# EAGLE board Board (EAGLE 8.0.2)
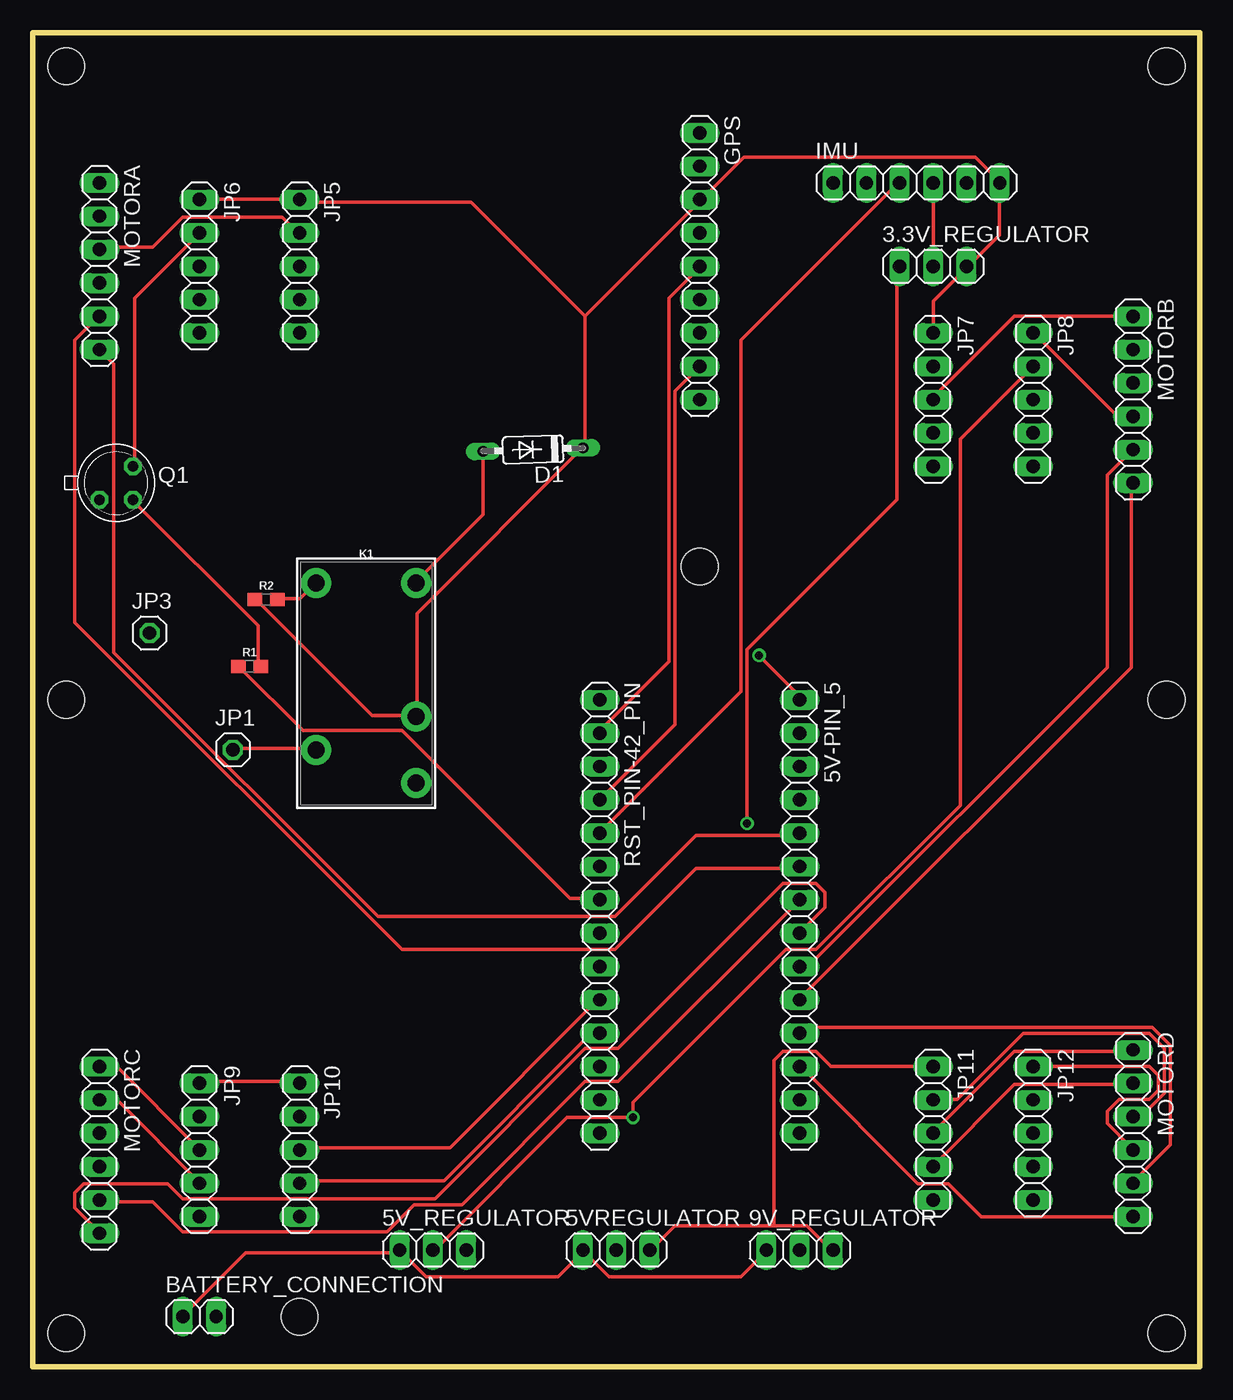
[diagram p0: board, top side]
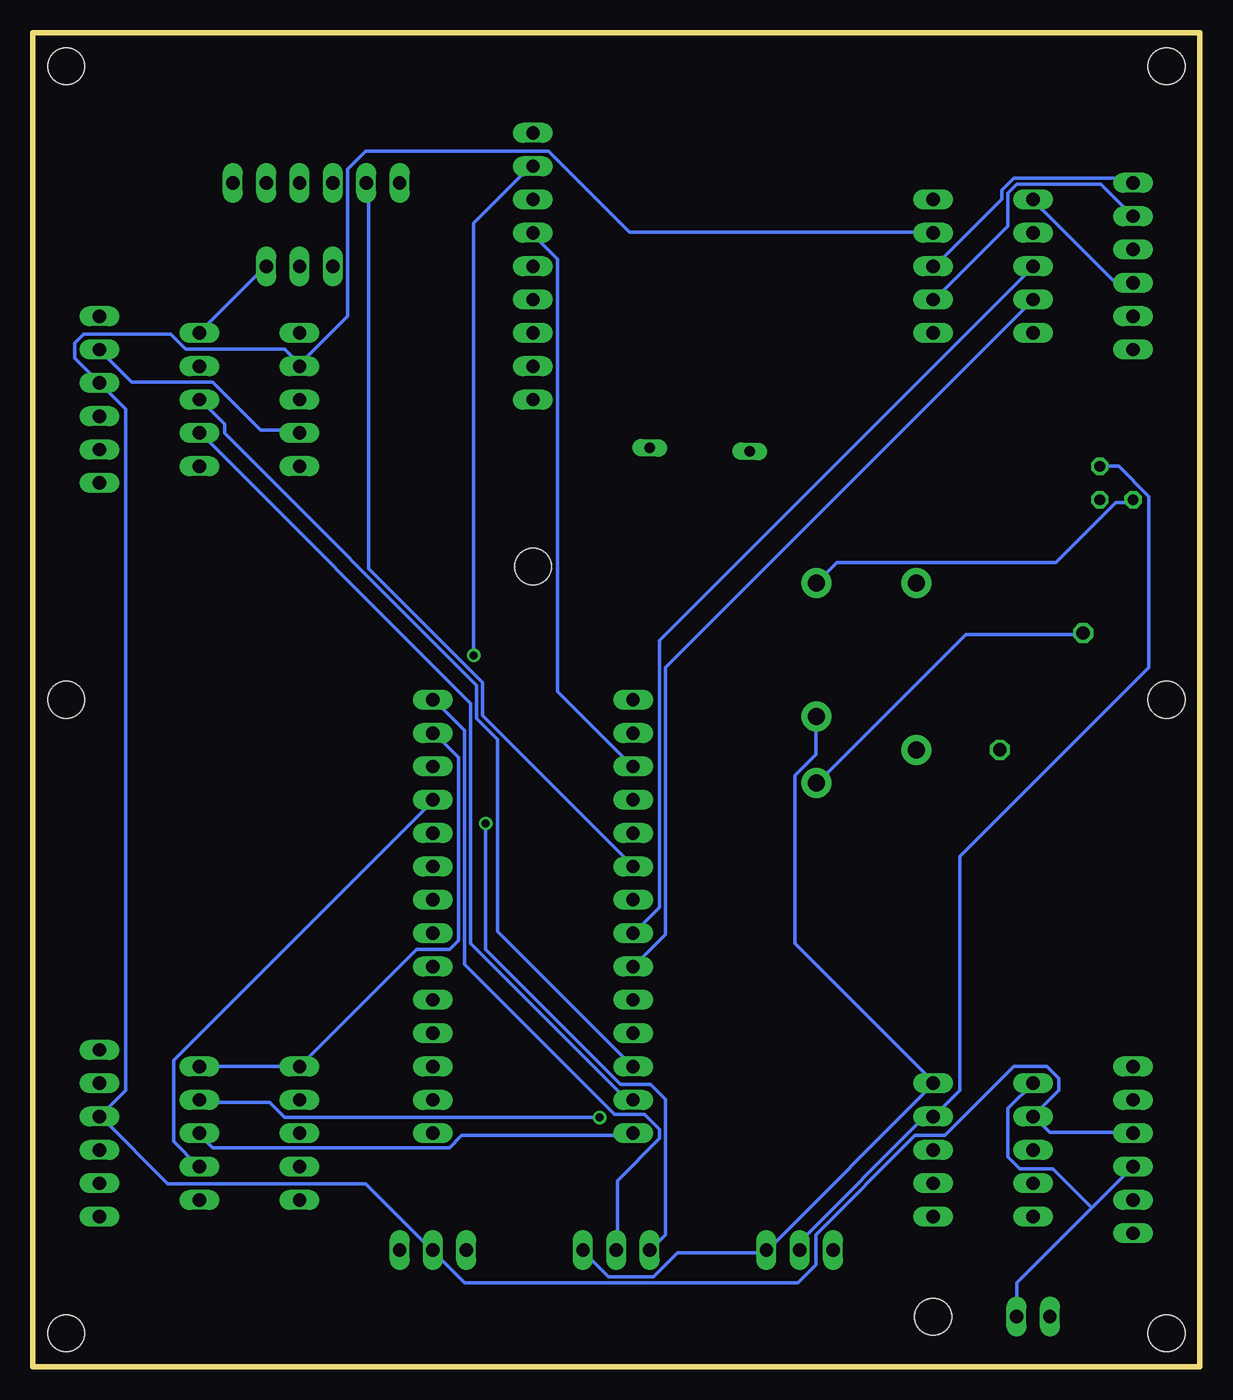
[diagram p1: board, bottom side, seen from below]

Size 88.9 x 101.6 mm. Coordinates in mm from the lower left corner, seen from the top.
Outline: 0,0 88.9,0 88.9,101.6 0,101.6 0,0
Copper layers (1*16): Top 0.035mm / dielectric 1.5mm / Bottom 0.035mm
Design rules "default": minimum track width 10mil, minimum drill 24mil, track to track 8mil, track to pad 8mil, pad to pad 8mil, via to via 8mil, smd to smd 8mil, copper to edge 40mil, drill to drill 8mil, minimum pad ring 10mil, minimum via ring 8mil, stop-mask expansion 4mil, vias tented up to drill 0mil, thermal gap 10mil
Holes 2.8 mm at 2.54,99.06 2.54,2.54 86.36,2.54 86.36,99.06 86.36,50.8 2.54,50.8 50.8,60.96 20.32,3.81

## Footprints (pad centres in the part's own frame; a part is rotated, then mirrored left to right if it is on the bottom)
1X03 = drill 1.016 long: 1 -2.54,0; 2 0,0; 3 2.54,0
1X14 = drill 1.016 long: 1 -16.51,0; 2 -13.97,0; 3 -11.43,0; 4 -8.89,0; 5 -6.35,0; 6 -3.81,0; 7 -1.27,0; 8 1.27,0; 9 3.81,0; 10 6.35,0; 11 8.89,0; 12 11.43,0; 13 13.97,0; 14 16.51,0
1X02 = drill 1.016 long: 1 -1.27,0; 2 1.27,0
DO35-7 = drill 0.813 long: A 3.81,0; C -3.81,0
1X09 = drill 1.016 long: 1 -10.16,0; 2 -7.62,0; 3 -5.08,0; 4 -2.54,0; 5 0,0; 6 2.54,0; 7 5.08,0; 8 7.62,0; 9 10.16,0
1X06 = drill 1.016 long: 1 -6.35,0; 2 -3.81,0; 3 -1.27,0; 4 1.27,0; 5 3.81,0; 6 6.35,0
1X01 = drill 1.016 octagon: 1 0,0
1X05 = drill 1.016 long: 1 -5.08,0; 2 -2.54,0; 3 0,0; 4 2.54,0; 5 5.08,0
RELAY-JZC = drill 1.3 pad 2.286: 1 3.81,-8.89; 2 -3.81,1.27; 3 -3.81,6.35; 4 3.81,3.81; 5 -3.81,-8.89
TO18 = drill 0.813 octagon: 1 -1.27,-1.27; 2 1.27,-1.27; 3 1.27,1.27
0603 = smd 1.1 x 1: 1 -0.85,0; 2 0.85,0

## Placement (x,y rotation side)
3.3V_REGULATOR  [1X03]  68.58,83.82 0 top
5V-PIN_5  [1X14]  58.42,34.29 270 top
5V_REGULATOR  [1X03]  30.48,8.89 0 top
5VREGULATOR  [1X03]  44.45,8.89 0 top
9V_REGULATOR  [1X03]  58.42,8.89 0 top
BATTERY_CONNECTION  [1X02]  12.7,3.81 0 top
D1  1N4148DO35-7  [DO35-7]  38.1,69.85 181.9 top
GPS  [1X09]  50.8,83.82 270 top
IMU  [1X06]  67.31,90.17 0 top
JP1  [1X01]  15.24,46.99 0 top
JP3  [1X01]  8.89,55.88 0 top
JP5  [1X05]  20.32,83.82 270 top
JP6  [1X05]  12.7,83.82 270 top
JP7  [1X05]  68.58,73.66 270 top
JP8  [1X05]  76.2,73.66 270 top
JP9  [1X05]  12.7,16.51 270 top
JP10  [1X05]  20.32,16.51 270 top
JP11  [1X05]  68.58,17.78 270 top
JP12  [1X05]  76.2,17.78 270 top
K1  RELAY-SPDT-JZC-11F  [RELAY-JZC]  25.4,50.8 180 top
MOTORA  [1X06]  5.08,83.82 270 top
MOTORB  [1X06]  83.82,73.66 270 top
MOTORC  [1X06]  5.08,16.51 270 top
MOTORD  [1X06]  83.82,17.78 270 top
Q1  2N2222A  [TO18]  6.35,67.31 0 top
R1  330  [0603]  16.51,53.34 0 top
R2  330  [0603]  17.78,58.42 0 top
RST_PIN-42_PIN  [1X14]  43.18,34.29 270 top

## Library data of the parts
3.3V_REGULATOR 5V-PIN_5 5V_REGULATOR 5VREGULATOR 9V_REGULATOR BATTERY_CONNECTION GPS IMU JP1 JP3 JP5-JP12 MOTORA MOTORB MOTORC MOTORD RST_PIN-42_PIN = pinhead
D1 = diode
K1 = SparkFun-Electromechanical; PROD_ID: COMP-09533; SF_SKU: COM-00100
Q1 = transistor-npn
R1 R2 = SparkFun-Resistors; PROD_ID: RES-00818

## Nets
N$1: GPS.5 RST_PIN-42_PIN.2
N$2: GPS.4 RST_PIN-42_PIN.3
N$3: Q1.2 R1.2
N$4: R1.1 RST_PIN-42_PIN.7
N$5: GPS.8 RST_PIN-42_PIN.4
N$6: IMU.3 RST_PIN-42_PIN.5
N$7: IMU.2 RST_PIN-42_PIN.6
N$8: JP6.3 RST_PIN-42_PIN.8
N$9: JP6.4 RST_PIN-42_PIN.9
N$11: JP10.3 RST_PIN-42_PIN.10
N$12: JP10.4 RST_PIN-42_PIN.11
N$13: JP8.3 RST_PIN-42_PIN.12
N$14: JP8.4 RST_PIN-42_PIN.13
N$15: JP12.3 RST_PIN-42_PIN.14
N$16: 5V-PIN_5.4 JP12.4
N$17: JP5.3 MOTORA.1
N$18: 9V_REGULATOR.2 JP5.2 JP7.2 JP9.2 JP11.2 MOTORA.3 MOTORB.3 MOTORC.3 MOTORD.3
N$19: 5V-PIN_5.7 MOTORC.5
N$20: JP9.4 MOTORC.2
N$21: 5V-PIN_5.8 MOTORC.6
N$22: 5V-PIN_5.9 MOTORB.5
N$23: 5V-PIN_5.5 MOTORA.6
N$24: 5V-PIN_5.6 MOTORA.5
N$25: 5V-PIN_5.10 MOTORB.6
N$26: 5V-PIN_5.11 MOTORD.5
N$27: 5V-PIN_5.12 MOTORD.6
N$28: JP11.3 MOTORD.1
N$29: JP11.4 MOTORD.2
N$30: JP5.4 MOTORA.2
N$31: K1.1 R2.2
N$32: D1.A K1.5 Q1.1
N$33: 3.3V_REGULATOR.1 5V_REGULATOR.1 5VREGULATOR.1 9V_REGULATOR.1 BATTERY_CONNECTION.1
N$34: JP7.3 MOTORB.1
N$35: JP7.4 MOTORB.2
N$36: JP1.1 K1.4
N$37: 5V_REGULATOR.2 JP6.2 JP8.2 JP10.2 JP12.2 Q1.3
N$38: JP3.1 K1.3
N$39: 5V-PIN_5.1 5VREGULATOR.2 GPS.2
N$40: JP9.3 MOTORC.1
N$41: 3.3V_REGULATOR.2 IMU.4
N$46: 3.3V_REGULATOR.3 5V-PIN_5.2 5V_REGULATOR.3 5VREGULATOR.3 9V_REGULATOR.3 BATTERY_CONNECTION.2 D1.C GPS.3 IMU.6 JP5.1 JP6.1 JP7.1 JP8.1 JP9.1 JP10.1 JP11.1 JP12.1 K1.2 MOTORA.4 MOTORB.4 MOTORC.4 MOTORD.4 R2.1

## Tracks (layer width: path | path; a pad name or v marks a point on that pad's centre or on a via)
N$1
  Top 0.254: RST_PIN-42_PIN.2 43.2,48.46 48.46,53.72 48.46,81.38 50.75,83.67 GPS.5
N$2
  Bottom 0.254: RST_PIN-42_PIN.3 43.2,45.72 48.92,51.44 48.92,84.35 50.75,86.18 GPS.4
N$3
  Top 0.254: R1.2 17.14,53.49 17.14,56.46 7.77,65.84 Q1.2
N$4
  Top 0.254: R1.1 15.77,53.26 20.57,48.46 28.12,48.46 40.92,35.66 42.98,35.66 RST_PIN-42_PIN.7
N$5
  Top 0.254: RST_PIN-42_PIN.4 48.92,48.92 48.92,74.3 50.75,76.12 GPS.8
N$6
  Top 0.254: RST_PIN-42_PIN.5 43.2,40.69 53.95,51.44 53.95,78.18 65.84,90.07 IMU.3
N$7
  Bottom 0.254: RST_PIN-42_PIN.6 43.2,38.18 54.63,49.61 54.63,52.12 63.32,60.81 63.32,90.07 IMU.2
N$8
  Bottom 0.254: JP6.3 12.8,83.67 41.15,55.32 41.15,34.98 42.98,33.15 RST_PIN-42_PIN.8
N$9
  Bottom 0.254: JP6.4 12.8,81.15 40.69,53.26 40.69,32.92 42.98,30.63 RST_PIN-42_PIN.9
N$11
  Top 0.254: JP10.3 20.34,16.69 31.77,16.69 42.98,27.89 RST_PIN-42_PIN.10
N$12
  Top 0.254: JP10.4 20.34,14.17 31.32,14.17 42.52,25.38 42.98,25.38 RST_PIN-42_PIN.11
N$13
  Bottom 0.254: RST_PIN-42_PIN.12 43.2,22.86 53.49,33.15 53.49,47.78 55.09,49.38 55.09,51.89 74.3,71.09 74.3,71.78 76.12,73.61 JP8.3
N$14
  Bottom 0.254: RST_PIN-42_PIN.13 43.2,20.34 43.66,20.34 55.55,32.23 55.55,50.52 76.12,71.09 JP8.4
N$15
  Bottom 0.254: RST_PIN-42_PIN.14 43.2,17.6 56.24,17.6 57.15,16.69 75.21,16.69 76.12,17.6 JP12.3
N$16
  Bottom 0.254: 5V-PIN_5.4 58.52,42.98 78.18,23.32 78.18,17.14 76.35,15.32 JP12.4
N$17
  Bottom 0.254: JP5.3 20.12,83.9 15.09,88.92 15.09,89.61 14.17,90.53 5.49,90.53 5.26,90.3 MOTORA.1
N$18
  Top 0.254: JP11.2 68.58,20.34 70.41,20.34 75.44,25.38 85.04,25.38 86.18,24.23 86.18,20.8 84.58,19.2 83.9,19.2 MOTORD.3 | MOTORA.3 5.26,85.27 9.14,85.27 11.43,87.55 18.97,87.55 20.12,86.41 JP5.2
  Bottom 0.254: MOTORC.3 5.26,17.83 11.43,17.83 12.57,18.97 JP9.2 12.57,19.2 10.74,21.03 10.74,21.95 11.66,22.86 14.17,22.86 19.43,17.6 21.72,17.6 29.26,10.06 29.26,7.77 30.63,6.4 56.01,6.4 58.29,8.69 9V_REGULATOR.2 58.52,8.91 63.55,13.95 78.64,13.95 83.67,18.97 MOTORD.3 81.84,21.03 81.84,72.92 83.67,74.75 MOTORB.3 83.9,74.98 85.72,76.81 85.72,77.95 85.04,78.64 78.41,78.64 77.27,77.5 69.72,77.5 68.58,76.35 | 68.58,76.35 64.92,80.01 64.92,91.21 63.55,92.58 49.61,92.58 43.43,86.41 20.34,86.41 JP5.2 | 68.58,76.35 JP7.2
N$19
  Top 0.254: 5V-PIN_5.7 44.58,21.72 42.06,21.72 32.69,12.34 29.03,12.34 26.98,10.29 11.43,10.29 9.14,12.57 5.26,12.57 MOTORC.5
N$20
  Top 0.254: MOTORC.2 5.26,20.12 6.63,20.12 12.57,14.17 JP9.4
N$21
  Top 0.254: MOTORC.6 5.03,10.29 3.2,12.12 3.2,13.26 3.89,13.95 10.29,13.95 11.43,12.8 30.63,12.8 42.06,24.23 44.58,24.23 57.15,36.8 59.66,36.8 60.35,36.12 60.35,34.98 58.52,33.15 5V-PIN_5.8
N$22
  Top 0.254: 5V-PIN_5.9 58.52,30.63 59.21,30.63 81.84,53.26 81.84,67.89 83.67,69.72 MOTORB.5
N$23
  Top 0.254: 5V-PIN_5.5 58.29,40.46 50.52,40.46 44.35,34.29 26.29,34.29 6.17,54.41 6.17,76.35 5.26,77.27 MOTORA.6
N$24
  Top 0.254: 5V-PIN_5.6 58.29,37.95 50.52,37.95 44.35,31.77 28.12,31.77 3.2,56.69 3.2,78.18 5.03,80.01 MOTORA.5
N$25
  Top 0.254: 5V-PIN_5.10 58.52,28.12 83.67,53.26 83.67,67.21 MOTORB.6
N$26
  Top 0.254: MOTORD.5 83.9,14.17 86.64,16.92 86.64,24.46 85.27,25.83 58.75,25.83 58.52,25.6 5V-PIN_5.11
N$27
  Top 0.254: MOTORD.6 72.24,11.43 69.72,13.95 67.44,13.95 58.52,22.86 5V-PIN_5.12
N$28
  Top 0.254: JP11.3 68.58,17.83 74.75,24 83.67,24 MOTORD.1
N$29
  Top 0.254: JP11.4 68.58,15.32 74.75,21.49 83.67,21.49 MOTORD.2
N$30
  Bottom 0.254: JP5.4 20.12,81.38 14.63,86.87 14.63,89.38 13.95,90.07 7.54,90.07 5.26,87.78 MOTORA.2
N$31
  Top 0.254: R2.2 18.75,58.52 20.34,58.52 21.49,59.66 K1.1
N$32
  Top 0.254: D1.A 34.29,64.92 29.26,59.89 K1.5
  Bottom 0.254: Q1.1 5.26,65.84 6.4,65.84 10.97,61.27 27.66,61.27 29.03,59.89 K1.5
N$33  (via drill 0.61)
  Top 0.254: BATTERY_CONNECTION.1 11.43,3.89 16.23,8.69 27.89,8.69 5V_REGULATOR.1 28.12,8.69 29.95,6.86 40.01,6.86 41.83,8.69 5VREGULATOR.1 42.06,8.69 43.89,6.86 53.95,6.86 55.78,8.69 9V_REGULATOR.1 | v54.41,41.38 54.41,54.63 65.84,66.06 65.84,83.67 3.3V_REGULATOR.1
  Bottom 0.254: v54.41,41.38 54.41,31.77 44.12,21.49 41.83,21.49 40.69,20.34 40.69,10.06 41.83,8.91 5VREGULATOR.1
N$34
  Top 0.254: MOTORB.1 74.75,80.01 68.58,73.84 JP7.3
N$35
  Bottom 0.254: JP7.4 68.58,71.32 71.55,71.32 75.21,74.98 81.38,74.98 83.67,77.27 MOTORB.2
N$36
  Top 0.254: JP1.1 15.32,47.09 21.49,47.09 K1.4
N$37  (via drill 0.61)
  Top 0.254: Q1.3 7.77,68.58 7.77,81.38 12.57,86.18 JP6.2 | 5V_REGULATOR.2 30.63,8.91 40.69,18.97 v45.72,18.97 45.72,20.12 57.38,31.77 59.66,31.77 70.64,42.75 70.64,70.64 JP8.2
  Bottom 0.254: 5V_REGULATOR.2 30.4,8.91 30.4,9.6 21.03,18.97 20.34,18.97 JP10.2 20.12,19.2 18.29,21.03 18.29,38.86 3.89,53.26 3.89,66.29 6.17,68.58 Q1.3 | v45.72,18.97 69.72,18.97 70.87,20.12 76.12,20.12 JP12.2
N$38
  Bottom 0.254: JP3.1 8.91,55.78 17.83,55.78 29.03,44.58 K1.3
N$39  (via drill 0.61)
  Top 0.254: v55.32,54.18 58.52,50.98 5V-PIN_5.1
  Bottom 0.254: 5VREGULATOR.2 44.35,8.91 44.35,14.17 41.15,17.37 41.15,18.06 42.29,19.2 44.58,19.2 56.01,30.63 56.01,48.46 58.29,50.75 5V-PIN_5.1 | v55.32,54.18 55.32,87.1 50.98,91.44 GPS.2
N$40
  Top 0.254: MOTORC.1 6.4,22.86 12.57,16.69 JP9.3
N$41
  Top 0.254: IMU.4 3.3V_REGULATOR.2
N$46
  Top 0.254: JP7.1 68.58,81.15 71.09,83.67 3.3V_REGULATOR.3 71.32,83.9 73.61,86.18 73.61,90.07 IMU.6 73.61,90.3 71.78,92.13 54.18,92.13 50.98,88.92 GPS.3 50.75,88.7 42.06,80.01 | MOTORB.4 83.67,72.47 82.53,72.47 76.35,78.64 JP8.1 | JP6.1 12.8,88.92 20.12,88.92 JP5.1 20.34,88.7 33.38,88.7 42.06,80.01 | R2.1 17.14,58.29 25.83,49.61 29.03,49.61 K1.2 29.26,49.61 29.26,57.38 41.83,69.95 D1.C 42.06,70.18 42.06,80.01 | JP12.1 85.04,22.86 85.72,22.17 85.72,21.03 85.04,20.34 82.75,20.34 81.84,19.43 81.84,18.52 83.67,16.69 MOTORD.4 | 56.46,10.74 48.92,10.74 47.09,8.91 5VREGULATOR.3 | 56.46,10.74 58.98,10.74 60.81,8.91 9V_REGULATOR.3 | JP9.1 12.8,21.72 20.12,21.72 JP10.1 | JP11.1 60.81,22.86 59.66,24 57.15,24 56.46,23.32 56.46,10.74
  Bottom 0.254: JP8.1 76.12,78.87 71.32,83.67 3.3V_REGULATOR.3 | MOTORA.4 5.26,82.75 6.63,82.75 12.57,88.7 JP6.1 | JP12.1 JP11.1 59.66,31.77 57.15,31.77 56.46,32.46 56.46,46.41 58.29,48.23 5V-PIN_5.2 | 5VREGULATOR.3 46.86,8.69 45.03,6.86 41.6,6.86 39.78,8.69 33.15,8.69 5V_REGULATOR.3 32.92,8.91 20.34,21.49 JP10.1 20.34,21.72 30.86,32.23 30.86,45.03 29.26,46.63 29.26,49.38 K1.2 | 8.23,12.12 5.26,15.09 MOTORC.4 | 8.23,12.12 13.95,6.4 13.95,3.89 BATTERY_CONNECTION.2 | JP9.1 14.63,19.66 14.63,16 13.72,15.09 11.2,15.09 8.23,12.12